# EAGLE board HumanoidArduino (EAGLE 7.7.0)
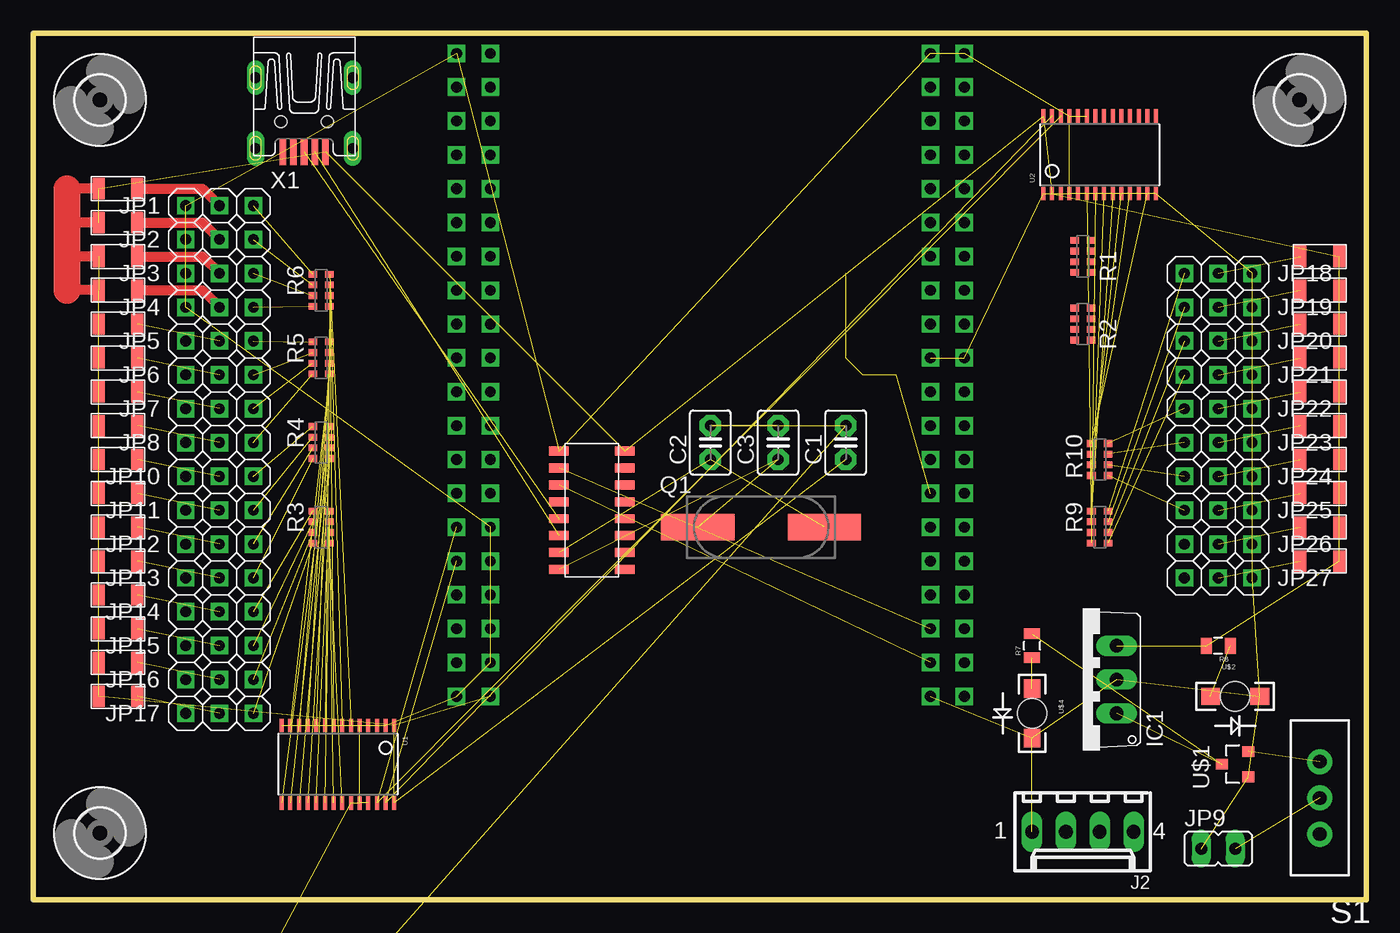
[diagram p0: board, top side]
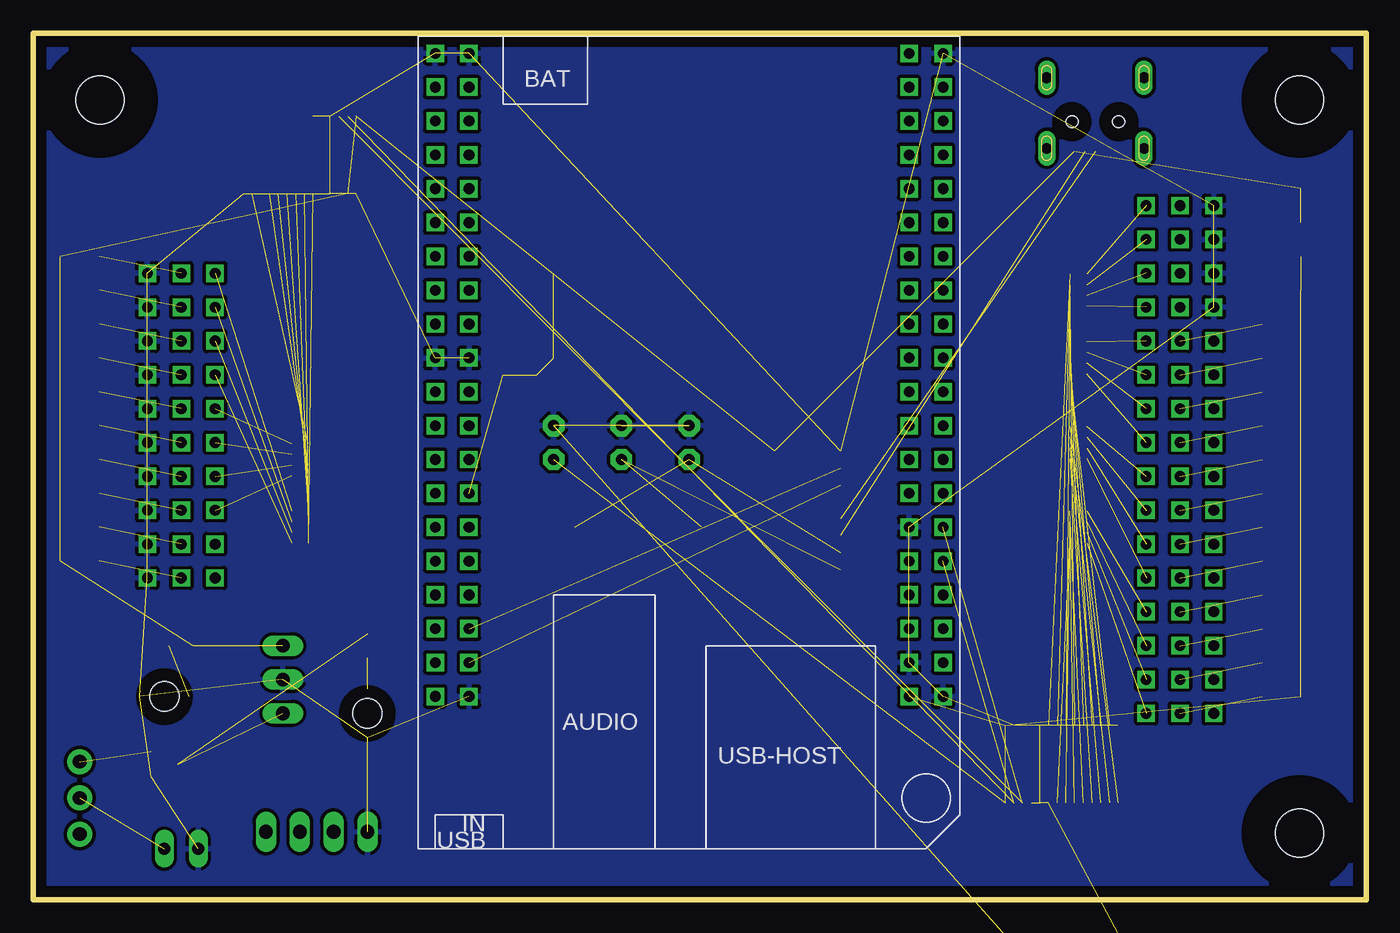
[diagram p1: board, bottom side, seen from below]

Size 100 x 65 mm. Coordinates in mm from the lower left corner, seen from the top.
Outline: 0,0 100,0 100,65 0,65 0,0
Copper layers (1*16): Top 0.035mm / dielectric 1.5mm / Bottom 0.035mm
Design rules "default": minimum track width 10mil, minimum drill 24mil, track to track 8mil, track to pad 8mil, pad to pad 8mil, via to via 8mil, smd to smd 8mil, copper to edge 40mil, drill to drill 8mil, minimum pad ring 10mil, minimum via ring 8mil, stop-mask expansion 4mil, vias tented up to drill 0mil, thermal gap 10mil
Milling: 4 lines

## Footprints (pad centres in the part's own frame; a part is rotated, then mirrored left to right if it is on the bottom)
C2.5-3 = drill 0.813 pad 1.6 octagon: 1 -1.27,0; 2 1.27,0
1206 = smd 0.9 x 1.6: P$1 1.45,0; P$2 -1.45,0
3,6 = hole 3.6: 0,0
TO220V = drill 1.016 long: 1 -2.54,-2.54; 2 0,-2.54; 3 2.54,-2.54
6410-04 = drill 1.016 long: 1 3.81,0; 2 1.27,0; 3 -1.27,0; 4 -3.81,0
CONN_3X1_0.1" = drill 0.8 square: P$1 -2.54,0; P$2 0,0; P$3 2.54,0
JP1 = drill 0.914 long: 1 0,-1.27; 2 0,1.27
CSM-7X-DU = smd 5.5 x 2: 1 -4.75,0; 2 4.75,0
0603-ARV = smd 0.5 x 0.65: 1 -1.2,-0.625; 2 -0.4,-0.625; 3 0.4,-0.625; 4 1.2,-0.625; 5 1.2,0.625; 6 0.4,0.625; 7 -0.4,0.625; 8 -1.2,0.625
0805 = smd 0.8 x 1.2: 1 -0.9,0; 2 0.9,0
SWITCH-SPDT_LOCK.007S = drill 1.016 pad 1.88: 1 0,2.718; 2 0,0; 3 0,-2.718
TSSOP28 = smd 0.305 x 0.991: 1 -4.225,-2.918; 2 -3.575,-2.918; 3 -2.925,-2.918; 4 -2.275,-2.918; 5 -1.625,-2.918; 6 -0.975,-2.918; 7 -0.325,-2.918; 8 0.325,-2.918; 9 0.975,-2.918; 10 1.625,-2.918; 11 2.275,-2.918; 12 2.925,-2.918; 13 3.575,-2.918; 14 4.225,-2.918; 15 4.225,2.918; 16 3.575,2.918; 17 2.925,2.918; 18 2.275,2.918; 19 1.625,2.918; 20 0.975,2.918; 21 0.325,2.918; 22 -0.325,2.918; 23 -0.975,2.918; 24 -1.625,2.918; 25 -2.275,2.918; 26 -2.925,2.918; 27 -3.575,2.918; 28 -4.225,2.918
SO-16 = smd 1.45 x 0.67: 1 -2.475,4.445; 2 -2.475,3.175; 3 -2.475,1.905; 4 -2.475,0.635; 5 -2.475,-0.635; 6 -2.475,-1.905; 7 -2.475,-3.175; 8 -2.475,-4.445; 9 2.475,-4.445; 10 2.475,-3.175; 11 2.475,-1.905; 12 2.475,-0.635; 13 2.475,0.635; 14 2.475,1.905; 15 2.475,3.175; 16 2.475,4.445
SOT23-3 = smd 0.8 x 0.9: 1 -0.95,-1; 2 0.95,-1; 3 0,1
HSMC-C265 = smd 1.4 x 1.25: A -1.85,0; C 1.85,0 | hole 2.2: 0,0
CHIP = drill 0.8 square: AP-EINT1 35.56,20.32; AP-EINT3 38.1,20.32; BAT 2.54,40.64; CHG-IN 2.54,48.26; CSICK 38.1,15.24; CSID0 35.56,10.16; CSID1 38.1,10.16; CSID2 35.56,7.62; CSID3 38.1,7.62; CSID4 35.56,5.08; CSID5 38.1,5.08; CSID6 35.56,2.54; CSID7 38.1,2.54; CSIHSYNC 35.56,12.7; CSIPCK 35.56,15.24; CSIVSYNC 38.1,12.7; FEL 35.56,40.64; GND@0 0,48.26; GND@1 2.54,45.72; GND@2 2.54,35.56; GND@3 0,0; GND@4 35.56,48.26; GND@5 35.56,22.86; GND@6 38.1,22.86; GND@7 35.56,0; GND@8 38.1,0; HPCOM 38.1,43.18; HPL 38.1,45.72; HPR 38.1,40.64; LCD-CLK 0,5.08; LCD-D2 0,27.94; LCD-D3 2.54,25.4; LCD-D4 0,25.4; LCD-D5 2.54,22.86; LCD-D6 0,22.86; LCD-D7 2.54,20.32; LCD-D10 0,20.32; LCD-D11 2.54,17.78; LCD-D12 0,17.78; LCD-D13 2.54,15.24; LCD-D14 0,15.24; LCD-D15 2.54,12.7; LCD-D18 0,12.7; LCD-D19 2.54,10.16; LCD-D20 0,10.16; LCD-D21 2.54,7.62; LCD-D22 0,7.62; LCD-D23 2.54,5.08; LCD-DE 2.54,0; LCD-HSYNC 2.54,2.54; LCD-VSYNC 0,2.54; LRADC 35.56,35.56; MICIN1 38.1,35.56; MICM 38.1,38.1; PWM0 2.54,27.94; PWRON 2.54,38.1; TS 2.54,43.18; TWI1-SCK 0,35.56; TWI1-SDA 0,38.1; TWI2-SCK 38.1,17.78; TWI2-SDA 35.56,17.78; UART1-RX 35.56,43.18; UART1-TX 35.56,45.72; VCC-1V8 0,40.64; VCC-3V3@0 0,43.18; VCC-3V3@1 35.56,38.1; VCC-5V@0 0,45.72; VCC-5V@1 38.1,48.26; X1 0,33.02; X2 2.54,33.02; XIO-P0 35.56,33.02; XIO-P1 38.1,33.02; XIO-P2 35.56,30.48; XIO-P3 38.1,30.48; XIO-P4 35.56,27.94; XIO-P5 38.1,27.94; XIO-P6 35.56,25.4; XIO-P7 38.1,25.4; Y1 0,30.48; Y2 2.54,30.48
UX60-MB-5S8 = smd 2 x 0.5: 1 8.65,1.6; 2 8.65,0.8; 3 8.65,0; 4 8.65,-0.8; 5 8.65,-1.6 | drill 0.8 long: M1 3.1,-3.65; M2 3.1,3.65; M3 8.4,3.65; M4 8.4,-3.65 | hole 0.9: 6.4,-1.75; 6.4,1.75

## Placement (x,y rotation side)
C1  100nF  [C2.5-3]  60.96,34.29 90 top
C2  22p  [C2.5-3]  50.8,34.29 90 top
C3  22p  [C2.5-3]  55.88,34.29 90 top
F1  POLYSWITCH  [1206]  6.35,53.34 0 top
F2  POLYSWITCH  [1206]  6.35,50.8 0 top
F3  POLYSWITCH  [1206]  6.35,48.26 0 top
F4  POLYSWITCH  [1206]  6.35,45.72 0 top
F5  POLYSWITCH  [1206]  6.35,43.18 0 top
F6  POLYSWITCH  [1206]  6.35,40.64 0 top
F7  POLYSWITCH  [1206]  6.35,38.1 0 top
F8  POLYSWITCH  [1206]  6.35,35.56 0 top
F9  POLYSWITCH  [1206]  6.35,33.02 0 top
F10  POLYSWITCH  [1206]  6.35,30.48 0 top
F11  POLYSWITCH  [1206]  6.35,27.94 0 top
F12  POLYSWITCH  [1206]  6.35,25.4 0 top
F13  POLYSWITCH  [1206]  6.35,22.86 0 top
F14  POLYSWITCH  [1206]  6.35,20.32 0 top
F15  POLYSWITCH  [1206]  6.35,17.78 0 top
F16  POLYSWITCH  [1206]  6.35,15.24 0 top
F17  POLYSWITCH  [1206]  96.52,48.26 180 top
F18  POLYSWITCH  [1206]  96.52,45.72 180 top
F19  POLYSWITCH  [1206]  96.52,43.18 180 top
F20  POLYSWITCH  [1206]  96.52,40.64 180 top
F21  POLYSWITCH  [1206]  96.52,38.1 180 top
F22  POLYSWITCH  [1206]  96.52,35.56 180 top
F23  POLYSWITCH  [1206]  96.52,33.02 180 top
F24  POLYSWITCH  [1206]  96.52,30.48 180 top
F25  POLYSWITCH  [1206]  96.52,27.94 180 top
F26  POLYSWITCH  [1206]  96.52,25.4 180 top
H1  MOUNT-HOLE3.6  [3,6]  5,5 0 top
H2  MOUNT-HOLE3.6  [3,6]  5,60 0 top
H3  MOUNT-HOLE3.6  [3,6]  95,60 0 top
IC1  7805TV  [TO220V]  78.74,16.51 90 top
J2  22-27-2041-04  [6410-04]  78.74,5.08 180 top
JP1  JUMPER_3X1_0.1  [CONN_3X1_0.1"]  13.97,52.07 180 top
JP2  JUMPER_3X1_0.1  [CONN_3X1_0.1"]  13.97,49.53 180 top
JP3  JUMPER_3X1_0.1  [CONN_3X1_0.1"]  13.97,46.99 180 top
JP4  JUMPER_3X1_0.1  [CONN_3X1_0.1"]  13.97,44.45 180 top
JP5  JUMPER_3X1_0.1  [CONN_3X1_0.1"]  13.97,41.91 180 top
JP6  JUMPER_3X1_0.1  [CONN_3X1_0.1"]  13.97,39.37 180 top
JP7  JUMPER_3X1_0.1  [CONN_3X1_0.1"]  13.97,36.83 180 top
JP8  JUMPER_3X1_0.1  [CONN_3X1_0.1"]  13.97,34.29 180 top
JP9  [JP1]  88.9,3.81 270 top
JP10  JUMPER_3X1_0.1  [CONN_3X1_0.1"]  13.97,31.75 180 top
JP11  JUMPER_3X1_0.1  [CONN_3X1_0.1"]  13.97,29.21 180 top
JP12  JUMPER_3X1_0.1  [CONN_3X1_0.1"]  13.97,26.67 180 top
JP13  JUMPER_3X1_0.1  [CONN_3X1_0.1"]  13.97,24.13 180 top
JP14  JUMPER_3X1_0.1  [CONN_3X1_0.1"]  13.97,21.59 180 top
JP15  JUMPER_3X1_0.1  [CONN_3X1_0.1"]  13.97,19.05 180 top
JP16  JUMPER_3X1_0.1  [CONN_3X1_0.1"]  13.97,16.51 180 top
JP17  JUMPER_3X1_0.1  [CONN_3X1_0.1"]  13.97,13.97 180 top
JP18  JUMPER_3X1_0.1  [CONN_3X1_0.1"]  88.9,46.99 0 top
JP19  JUMPER_3X1_0.1  [CONN_3X1_0.1"]  88.9,44.45 0 top
JP20  JUMPER_3X1_0.1  [CONN_3X1_0.1"]  88.9,41.91 0 top
JP21  JUMPER_3X1_0.1  [CONN_3X1_0.1"]  88.9,39.37 0 top
JP22  JUMPER_3X1_0.1  [CONN_3X1_0.1"]  88.9,36.83 0 top
JP23  JUMPER_3X1_0.1  [CONN_3X1_0.1"]  88.9,34.29 0 top
JP24  JUMPER_3X1_0.1  [CONN_3X1_0.1"]  88.9,31.75 0 top
JP25  JUMPER_3X1_0.1  [CONN_3X1_0.1"]  88.9,29.21 0 top
JP26  JUMPER_3X1_0.1  [CONN_3X1_0.1"]  88.9,26.67 0 top
JP27  JUMPER_3X1_0.1  [CONN_3X1_0.1"]  88.9,24.13 0 top
Q1  12MHz  [CSM-7X-DU]  54.61,27.94 0 top
R1  [0603-ARV]  78.74,48.26 90 top
R2  [0603-ARV]  78.74,43.18 90 top
R3  [0603-ARV]  21.59,27.94 270 top
R4  [0603-ARV]  21.59,34.29 270 top
R5  [0603-ARV]  21.59,40.64 270 top
R6  [0603-ARV]  21.59,45.72 270 top
R7  670R  [0805]  74.93,19.05 90 top
R8  330R  [0805]  88.9,19.05 180 top
R9  [0603-ARV]  80.01,27.94 270 top
R10  [0603-ARV]  80.01,33.02 270 top
S1  [SWITCH-SPDT_LOCK.007S]  96.52,7.62 180 top
U1  [TSSOP28]  22.86,10.16 180 top
U2  [TSSOP28]  80.01,55.88 0 top
U3  [TSSOP28]  1.27,-24.13 0 top  (outside the outline)
U4  CH340G  [SO-16]  41.91,29.21 0 top
U$1  P-CHANNEL-MOSFET  [SOT23-3]  90.17,10.16 90 top
U$2  HSMC-C265  [HSMC-C265]  90.17,15.24 0 top
U$3  CHIP  [CHIP]  31.75,63.5 180 bottom
U$4  HSMC-C265  [HSMC-C265]  74.93,13.97 270 top
X1  MINI-USB-UX60-MB-5S8  [UX60-MB-5S8]  20.32,64.77 270 top

## Library data of the parts
C1-C3 = capacitor-wima
F1-F26 = HumanoidLbr; CURRENT: 2A
H1-H3 = holes
IC1 = linear
J2 = con-molex; OC_FARNELL: unknown; OC_NEWARK: unknown
JP1-JP8 JP10-JP27 U4 = HumanoidLbr
JP9 = jumper
Q1 = crystal; OC_FARNELL: unknown; OC_NEWARK: unknown
R1-R6 R9 R10 = SparkFun-Resistors
R7 R8 = SparkFun-Passives
S1 = SparkFun-Electromechanical
U1-U3 = adafruit
U$1 = GeekAmmo
U$2 U$4 = SparkFun-Retired
U$3 = ZMZE
X1 = con-hirose; OC_FARNELL: unknown; OC_NEWARK: unknown

## Nets
4.2V_CHG: J2.2
8.4V: IC1.1 R7.2 U$1.3
8.4V_CHG: J2.3
8.4V_IN: JP9.2 S1.2
12.6V_CHG: J2.4
+5V: C1.1 F1.P$2 F2.P$2 F3.P$2 F4.P$2 F5.P$2 F6.P$2 F7.P$2 F8.P$2 F9.P$2 F10.P$2 F11.P$2 F12.P$2 F13.P$2 F14.P$2 F15.P$2 F16.P$2 F17.P$2 F18.P$2 F19.P$2 F20.P$2 F21.P$2 F22.P$2 F23.P$2 F24.P$2 F25.P$2 F26.P$2 IC1.3 R8.2 U1.1 U1.28 U2.2 U2.28 U4.16 U$3.CHG-IN X1.1
\O\E: U$3.XIO-P0
D+: U4.5 X1.3
D-: U4.6 X1.2
GND: C1.2 C2.2 C3.2 IC1.2 J2.1 JP1.P$3 JP2.P$3 JP3.P$3 JP4.P$3 JP9.1 JP18.P$3 JP19.P$3 JP20.P$3 JP21.P$3 JP22.P$3 JP23.P$3 JP24.P$3 JP25.P$3 JP26.P$3 JP27.P$3 U1.2 U1.3 U1.4 U1.5 U1.14 U1.23 U1.24 U1.25 U2.1 U2.3 U2.4 U2.5 U2.14 U2.23 U2.24 U2.25 U3.14 U4.1 U$1.1 U$2.C U$3.GND@0 U$3.GND@1 U$3.GND@2 U$3.GND@3 U$3.GND@4 U$3.GND@5 U$3.GND@6 U$3.GND@7 U$3.GND@8 U$4.C X1.5
N$2: JP1.P$1 R6.1
N$3: JP2.P$1 R6.2
N$4: JP3.P$1 R6.3
N$5: JP4.P$1 R6.4
N$6: F3.P$1 JP3.P$2
N$7: F4.P$1 JP4.P$2
N$8: F16.P$1 JP17.P$2
N$9: F15.P$1 JP16.P$2
N$10: F14.P$1 JP15.P$2
N$11: F13.P$1 JP14.P$2
N$12: F12.P$1 JP13.P$2
N$13: F11.P$1 JP12.P$2
N$14: F10.P$1 JP11.P$2
N$15: F9.P$1 JP10.P$2
N$16: F8.P$1 JP8.P$2
N$17: F7.P$1 JP7.P$2
N$18: F6.P$1 JP6.P$2
N$19: F5.P$1 JP5.P$2
N$20: JP5.P$1 R5.1
N$21: JP6.P$1 R5.2
N$22: JP7.P$1 R5.3
N$23: JP8.P$1 R5.4
N$24: JP10.P$1 R4.1
N$25: JP11.P$1 R4.2
N$26: S1.3 U$1.2
N$27: F1.P$1 JP1.P$2
N$28: R7.1 U$4.A
N$29: R8.1 U$2.A
N$30: F2.P$1 JP2.P$2
N$31: JP12.P$1 R4.3
N$32: JP13.P$1 R4.4
N$33: JP14.P$1 R3.1
N$34: JP15.P$1 R3.2
N$35: JP16.P$1 R3.3
N$36: JP17.P$1 R3.4
N$38: F21.P$1 JP22.P$2
N$39: F20.P$1 JP21.P$2
N$40: F19.P$1 JP20.P$2
N$41: F18.P$1 JP19.P$2
N$42: F17.P$1 JP18.P$2
N$43: JP18.P$1 R9.8
N$44: JP19.P$1 R9.7
N$45: JP20.P$1 R9.6
N$46: JP21.P$1 R9.5
N$47: JP22.P$1 R10.8
N$48: F22.P$1 JP23.P$2
N$49: F23.P$1 JP24.P$2
N$50: F24.P$1 JP25.P$2
N$51: F25.P$1 JP26.P$2
N$52: F26.P$1 JP27.P$2
N$53: JP23.P$1 R10.7
N$54: JP24.P$1 R10.6
N$55: JP25.P$1 R10.5
N$56: C2.1 Q1.2 U4.7
N$57: C3.1 Q1.1 U4.8
PWM0: R6.8 U1.6
PWM1: R6.7 U1.7
PWM2: R6.6 U1.8
PWM3: R6.5 U1.9
PWM4: R5.8 U1.10
PWM5: R5.7 U1.11
PWM6: R5.6 U1.12
PWM7: R5.5 U1.13
PWM8: R4.8 U1.15
PWM9: R4.7 U1.16
PWM10: R4.6 U1.17
PWM11: R4.5 U1.18
PWM12: R3.8 U1.19
PWM13: R3.7 U1.20
PWM14: R3.6 U1.21
PWM15: R3.5 U1.22
PWM16: R9.4 U2.6
PWM17: R9.3 U2.7
PWM18: R9.2 U2.8
PWM19: R9.1 U2.9
PWM20: R10.4 U2.10
PWM21: R10.3 U2.11
PWM22: U2.12
PWM23: R10.1 U2.13
PWM24: U2.15
PWM25: U2.16
PWM26: U2.17
PWM27: U2.18
PWM28: U2.19
PWM29: U2.20
PWM30: U2.21
PWM31: U2.22
RX: U4.3 U$3.UART1-TX
SCL: U1.26 U2.26 U$3.TWI1-SCK
SDA: U1.27 U2.27 U$3.TWI1-SDA
TX: U4.2 U$3.UART1-RX
VDD: U3.28

## Tracks (layer width: path | path; a pad name or v marks a point on that pad's centre or on a via)
8.4V  (2 unrouted)
8.4V_IN  (1 unrouted)
+5V  (34 unrouted)
  Top 0.762: F4.P$2 2.54,45.72 | F3.P$2 2.54,48.26 | F2.P$2 2.54,50.8 | F1.P$2 2.54,53.34
  Top 2.032: 2.54,45.72 2.54,53.34
\O\E  (4 unrouted)
D+  (1 unrouted)
D-  (1 unrouted)
GND  (50 unrouted)
  pour Bottom (isolate 0.254): 0,0 0,65 100,65 100,0
N$2  (1 unrouted)
N$3  (1 unrouted)
N$4  (1 unrouted)
N$5  (1 unrouted)
N$6
  Top 0.762: F3.P$1 12.7,48.26 JP3.P$2
N$7
  Top 0.762: F4.P$1 12.7,45.72 JP4.P$2
N$8  (1 unrouted)
N$9  (1 unrouted)
N$10  (1 unrouted)
N$11  (1 unrouted)
N$12  (1 unrouted)
N$13  (1 unrouted)
N$14  (1 unrouted)
N$15  (1 unrouted)
N$16  (1 unrouted)
N$17  (1 unrouted)
N$18  (1 unrouted)
N$19  (1 unrouted)
N$20  (1 unrouted)
N$21  (1 unrouted)
N$22  (1 unrouted)
N$23  (1 unrouted)
N$24  (1 unrouted)
N$25  (1 unrouted)
N$26  (1 unrouted)
N$27
  Top 0.762: F1.P$1 12.7,53.34 JP1.P$2
N$28  (1 unrouted)
N$29  (1 unrouted)
N$30
  Top 0.762: F2.P$1 12.7,50.8 JP2.P$2
N$31  (1 unrouted)
N$32  (1 unrouted)
N$33  (1 unrouted)
N$34  (1 unrouted)
N$35  (1 unrouted)
N$36  (1 unrouted)
N$38  (1 unrouted)
N$39  (1 unrouted)
N$40  (1 unrouted)
N$41  (1 unrouted)
N$42  (1 unrouted)
N$43  (1 unrouted)
N$44  (1 unrouted)
N$45  (1 unrouted)
N$46  (1 unrouted)
N$47  (1 unrouted)
N$48  (1 unrouted)
N$49  (1 unrouted)
N$50  (1 unrouted)
N$51  (1 unrouted)
N$52  (1 unrouted)
N$53  (1 unrouted)
N$54  (1 unrouted)
N$55  (1 unrouted)
N$56  (2 unrouted)
N$57  (2 unrouted)
PWM0  (1 unrouted)
PWM1  (1 unrouted)
PWM2  (1 unrouted)
PWM3  (1 unrouted)
PWM4  (1 unrouted)
PWM5  (1 unrouted)
PWM6  (1 unrouted)
PWM7  (1 unrouted)
PWM8  (1 unrouted)
PWM9  (1 unrouted)
PWM10  (1 unrouted)
PWM11  (1 unrouted)
PWM12  (1 unrouted)
PWM13  (1 unrouted)
PWM14  (1 unrouted)
PWM15  (1 unrouted)
PWM16  (1 unrouted)
PWM17  (1 unrouted)
PWM18  (1 unrouted)
PWM19  (1 unrouted)
PWM20  (1 unrouted)
PWM21  (1 unrouted)
PWM23  (1 unrouted)
RX  (1 unrouted)
SCL  (2 unrouted)
SDA  (2 unrouted)
TX  (1 unrouted)

## Text on the board
Document: BATTERY